# EAGLE board Sen (EAGLE 6.0)
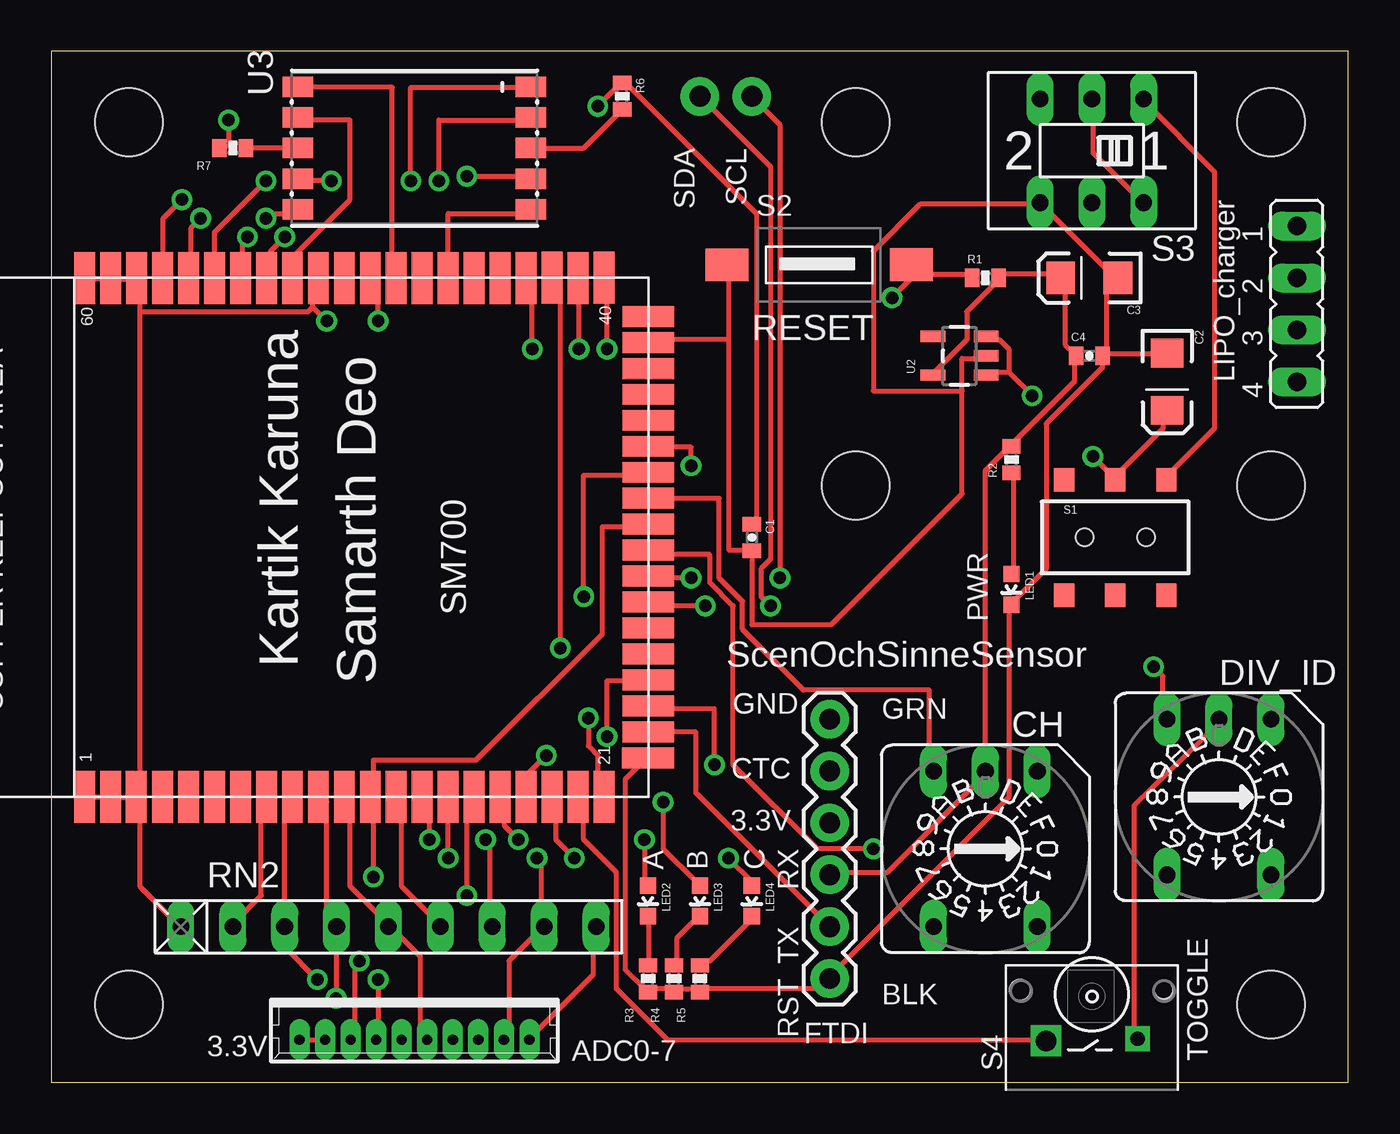
[diagram p0: board, top side]
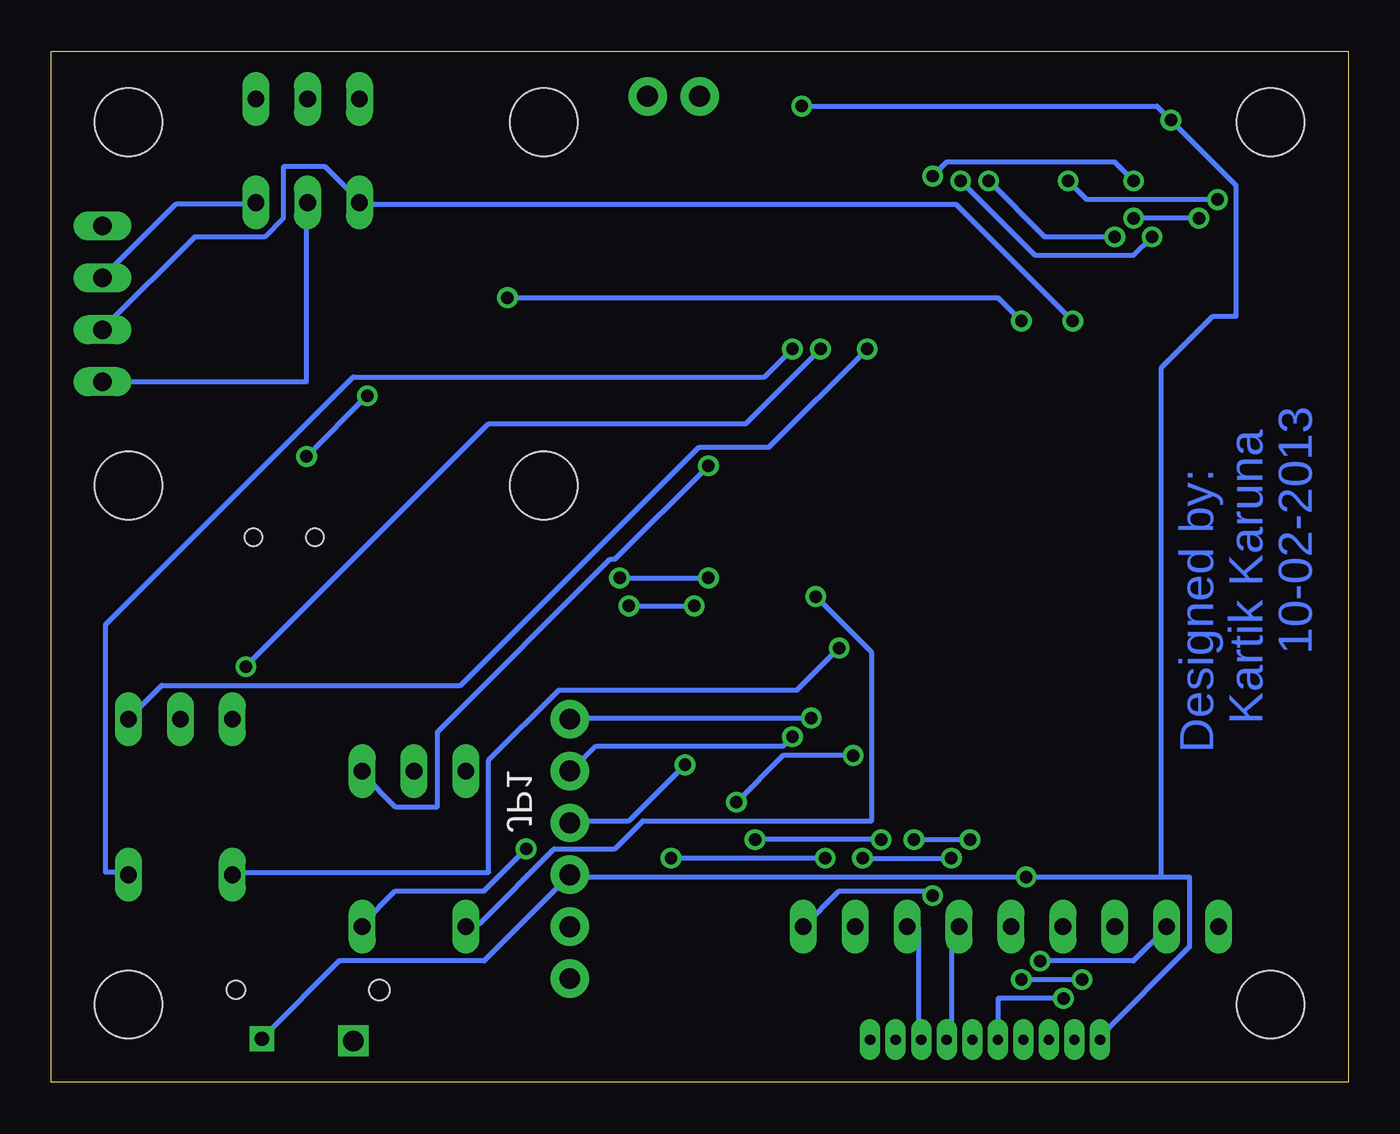
[diagram p1: board, bottom side, seen from below]

Size 63.48 x 50.47 mm. Coordinates in mm from the lower left corner, seen from the top.
Outline: 0,0 63.48,0 63.48,50.47 0,50.47 0,0
Copper layers (1*16): Top 0.035mm / dielectric 1.5mm / Bottom 0.035mm
Design rules: minimum track width 10mil, minimum drill 24mil, track to track 8mil, track to pad 8mil, pad to pad 8mil, via to via 8mil, smd to smd 8mil, copper to edge 40mil, drill to drill 8mil, minimum pad ring 10mil, minimum via ring 8mil, stop-mask expansion 4mil, vias tented up to drill 0mil, thermal gap 10mil
tRestrict: area 49.5,25.4 to 54.6,27.9; area 53.7,3.8 to 55,5.1; area 47,3.8 to 48.3,5.1; area 36.8,26.7 to 41.9,31.8; area 57.1,1.3 to 62.2,6.3; area 57.1,26.7 to 62.2,31.8; area 36.8,44.5 to 41.9,49.5
bRestrict: area 49.5,25.4 to 54.6,27.9; area 47,3.8 to 48.3,5.1; area 53.7,3.8 to 55,5.1; area 36.8,26.7 to 41.9,31.8; area 57.1,1.3 to 62.2,6.3; area 57.1,26.7 to 62.2,31.8; area 36.8,44.5 to 41.9,49.5

## Footprints (pad centres in the part's own frame; a part is rotated, then mirrored left to right if it is on the bottom)
0402-CAP = smd 0.7 x 0.9: 1 -0.65,0; 2 0.65,0
EIA3216 = smd 1.4 x 1.6: A 1.4,0; C -1.4,0
A1353HEX = drill 0.813 long: 1 3.81,-2.54; 2 -3.81,2.54; 4 3.81,2.54; 8 -3.81,-2.54; C 3.81,0
FTDI_BASIC = drill 1.016 pad 1.88: CTS 10.16,0; DTR 0,0; GND 12.7,0; RXI 2.54,0; TXO 5.08,0; VCC 7.62,0
JP4 = drill 0.914 long: 1 -3.81,0; 2 -1.27,0; 3 1.27,0; 4 3.81,0
1X02_NO_SILK = drill 1.016 pad 1.88: 1 0,0; 2 2.54,0
STAND-OFF = hole 3.302: 0,0
LED-0603 = smd 0.8 x 0.8: A 0,-0.75; C 0,0.75
0402-RES = smd 0.7 x 0.9: 1 -0.65,0; 2 0.65,0
RN-9 = drill 0.813 long: 1 -10.16,0; 2 -7.62,0; 3 -5.08,0; 4 -2.54,0; 5 0,0; 6 2.54,0; 7 5.08,0; 8 7.62,0; 9 10.16,0
AYZ0202 = smd 1 x 1.15: 1 -2.5,2.825; 2 0,2.825; 3 2.5,2.825; 4 -2.5,-2.825; 5 0,-2.825; 6 2.5,-2.825 | hole 0.85: 1.5,0; -1.5,0
TYCO_FSM = smd 1.6 x 2.1: 1 0,-4.51; 2 -0.01,4.5
A68-A31 = drill 0.813 long: 1 -2.54,-2.54; 2 0,-2.54; 3 2.54,-2.54; 4 -2.54,2.54; 5 0,2.54; 6 2.54,2.54
TYCO_FSMRACDA = drill 1 square: 1 0,2.24 | drill 0.7 square: 2 0.1,-2.24 | hole 1: 2.5,3.5 | hole 0.9: 2.5,-3.5
SYNAPSE_SN700PC1 = smd 2.54 x 1.02: P$1 0,28.83; P$2 0,27.56; P$3 0,26.32; P$4 0,25.02; P$5 0,23.75; P$6 0,22.48; P$7 0,21.21; P$8 0,19.94; P$9 0,18.67; P$10 0,17.4; P$11 0,16.13; P$12 0,14.86; P$13 0,13.59; P$14 0,12.32; P$15 0,11.05; P$16 0,9.78; P$17 0,8.51; P$18 0,7.24; P$19 0,5.97; P$20 0,4.7; P$21 0,3.43; P$40 25.41,3.43; P$41 25.4,4.7; P$42 25.42,5.97; P$43 25.4,7.24; P$44 25.4,8.51; P$45 25.4,9.78; P$46 25.4,11.05; P$47 25.4,12.32; P$48 25.4,13.59; P$49 25.4,14.86; P$50 25.4,16.13; P$51 25.4,17.4; P$52 25.4,18.67; P$53 25.4,19.94; P$54 25.4,21.21; P$55 25.4,22.48; P$56 25.4,23.75; P$57 25.4,25.02; P$58 25.4,26.29; P$59 25.4,27.56; P$60 25.4,28.83 | smd 1.02 x 2.54: P$22 1.91,1.27; P$23 3.19,1.26; P$24 4.46,1.26; P$25 5.73,1.26; P$26 7,1.26; P$27 8.27,1.26; P$28 9.54,1.26; P$29 10.82,1.26; P$30 12.09,1.26; P$31 13.35,1.26; P$32 14.62,1.26; P$33 15.89,1.26; P$34 17.16,1.26; P$35 18.43,1.26; P$36 19.7,1.26; P$37 20.97,1.26; P$38 22.24,1.26; P$39 23.51,1.26
SOT23-5 = smd 0.55 x 1.2: 1 -0.95,-1.3; 2 0,-1.3; 3 0.95,-1.3; 4 0.95,1.3; 5 -0.95,1.3
SMD-7SEG = smd 1 x 1.5: 1 3,-5.7; 2 1.5,-5.7; 3 0,-5.7; 4 -1.5,-5.7; 5 -3,-5.7; 6 -3,5.7; 7 -1.5,5.7; 8 0,5.7; 9 1.5,5.7; 10 3,5.7
53047-10 = drill 0.5 pad 0.698 long: 1 5.625,0.45; 2 4.375,0.45; 3 3.125,0.45; 4 1.875,0.45; 5 0.625,0.45; 6 -0.625,0.45; 7 -1.875,0.45; 8 -3.125,0.45; 9 -4.375,0.45; 10 -5.625,0.45

## Placement (x,y rotation side)
C1  10uF  [0402-CAP]  34.29,26.67 270 top
C2  10uF  [EIA3216]  54.61,34.29 270 top
C3  10uF  [EIA3216]  50.8,39.37 180 top
C4  1uF  [0402-CAP]  50.8,35.56 0 top
CH  HIX DIP  [A1353HEX]  45.72,11.43 90 top
DIV_ID  HIX DIP  [A1353HEX]  57.15,13.97 90 top
JP1  FTDI  [FTDI_BASIC]  38.1,17.78 270 top
JP2  LIPO_charger  [JP4]  60.96,38.1 270 top
JP3  I2C_BUS  [1X02_NO_SILK]  31.75,48.26 0 top
JP4  STAND-OFF  [STAND-OFF]  59.69,3.81 0 top
JP5  STAND-OFF  [STAND-OFF]  3.81,3.81 0 top
JP6  STAND-OFF  [STAND-OFF]  3.81,46.99 0 top
JP7  STAND-OFF  [STAND-OFF]  59.69,46.99 0 top
JP8  STAND-OFF  [STAND-OFF]  59.69,29.21 0 top
JP9  STAND-OFF  [STAND-OFF]  39.37,46.99 0 top
JP10  STAND-OFF  [STAND-OFF]  39.37,29.21 0 top
LED1  RED  [LED-0603]  46.99,24.13 180 top
LED2  GREEN  [LED-0603]  29.21,8.89 180 top
LED3  YELLOW  [LED-0603]  31.75,8.89 180 top
LED4  BLUE  [LED-0603]  34.29,8.89 180 top
R1  100k  [0402-RES]  45.72,39.37 0 top
R2  1k  [0402-RES]  46.99,30.48 90 top
R3  330  [0402-RES]  29.21,5.08 90 top
R4  330  [0402-RES]  30.48,5.08 90 top
R5  330  [0402-RES]  31.75,5.08 90 top
R6  330  [0402-RES]  27.94,48.26 270 top
R7  330  [0402-RES]  8.89,45.72 0 top
RN2  22K  [RN-9]  16.51,7.62 0 top
S1  Secondary sw  [AYZ0202]  52.07,26.67 0 top
S2  RESET  [TYCO_FSM]  37.59,40.01 270 top
S3  Primary sw  [A68-A31]  50.93,45.59 180 top
S4  TOGGLE  [TYCO_FSMRACDA]  50.93,2.03 90 top
U1  SM700PC1SMD  [SYNAPSE_SN700PC1]  30.48,13.97 90 top
U2  MIC5219  [SOT23-5]  44.45,35.56 90 top
U3  KCSA03-102SMD_7SEG  [SMD-7SEG]  17.78,45.72 90 top
X2  ADC0-7  [53047-10]  17.78,2.54 180 top

## Library data of the parts
C1-C4 R1-R7 = SparkFun-Passives
CH DIV_ID = switch-dil; OC_FARNELL: unknown; OC_NEWARK: unknown
JP1 JP3 = SparkFun-Connectors
JP2 = jumper
JP4-JP10 = SparkFun
LED1-LED4 = SparkFun-LED
RN2 = resistor-net; OC_FARNELL: unknown; OC_NEWARK: unknown
S1 = SparkFun-Electromechanical
S2 S4 = cy_fsmsm
S3 = switch
U1 = Synapse_SM700PC1
U2 = SparkFun-PowerIC
U3 = cy-7-seg
X2 = con-molex; MF: MOLEX; MPN: 53047-1010; OC_FARNELL: 9733086; OC_NEWARK: 57H4711

## Nets
3.3V: C1.1 C3.A C4.1 CH.C DIV_ID.C JP1.VCC R1.2 R2.2 R6.1 R7.1 S4.2 U1.P$12 U1.P$31 U2.5 X2.1 X2.2
7SEG_A: U1.P$57 U3.7
7SEG_B: U1.P$56 U3.6
7SEG_C: U1.P$55 U3.4
7SEG_D: U1.P$54 U3.2
7SEG_DP: U1.P$46 U3.5
7SEG_E: U1.P$53 U3.1
7SEG_F: U1.P$52 U3.9
7SEG_G: U1.P$48 U3.10
ADC0: RN2.2 U1.P$8 X2.3
ADC1: RN2.3 U1.P$9 X2.4
ADC2: RN2.4 U1.P$10 X2.5
ADC3: RN2.5 U1.P$11 X2.6
ADC4: RN2.6 U1.P$13 X2.7
ADC5: RN2.7 U1.P$14 X2.8
ADC6: RN2.8 U1.P$15 X2.9
ADC7: RN2.9 U1.P$16 X2.10
CH_1: CH.1 U1.P$34
CH_2: CH.2 U1.P$33
CH_3: CH.4 U1.P$32
CH_4: CH.8 U1.P$30
CTS2: JP1.CTS U1.P$23
DIV_1: DIV_ID.1 U1.P$43
DIV_2: DIV_ID.2 U1.P$42
DIV_3: DIV_ID.4 U1.P$41
DIV_4: DIV_ID.8 U1.P$40
EN: JP2.4 S3.5
GND: C1.2 C2.C C3.C C4.2 JP1.GND JP2.3 LED1.C R3.1 R4.1 R5.1 RN2.1 S2.1 S3.6 U1.P$1 U1.P$2 U1.P$3 U1.P$22 U1.P$38 U1.P$51 U1.P$58 U1.P$59 U1.P$60 U2.2
LED2: LED2.A U1.P$17
LED3: LED3.A U1.P$18
LED4: LED4.A U1.P$19
N$1: LED3.C R4.2
N$2: LED1.A R2.1
N$3: R6.2 U3.3
N$4: LED2.C R3.2
N$5: R7.2 U3.8
N$6: LED4.C R5.2
PS: JP2.1
RESET: R1.1 S2.2 U1.P$49
RTS2: JP1.DTR U1.P$21
RX2: JP1.TXO U1.P$24
SCL: JP3.2 U1.P$29
SDA: JP3.1 U1.P$28
TOGL: S4.1 U1.P$20
TX2: JP1.RXI U1.P$25
VBATT: JP2.2 S3.2 S3.4
VCC1: S1.3 S3.1
VIN: C2.A S1.2 U2.1 U2.3

## Tracks (layer width: path | path; a pad name or v marks a point on that pad's centre or on a via)
3.3V  (via drill 0.61)
  Top 0.254: C1.1 34.29,27.43 34.52,27.66 34.52,42.52 28.12,48.92 R6.1 27.89,48.92 v26.75,47.78 | v8.69,47.09 8.69,45.95 8.46,45.72 R7.1 | U2.5 43.2,34.75 44.81,36.35 44.81,37.72 46.18,39.09 46.18,39.32 R1.2 46.41,39.55 49.38,39.55 C3.A 49.61,39.32 49.61,36.12 50.06,35.66 C4.1 50.06,35.43 50.06,34.29 47.09,31.32 R2.2 46.86,31.09 45.72,29.95 CH.C 45.72,15.09 40.92,10.29 38.18,10.29 JP1.VCC | X2.1 12.34,2.06 13.26,2.06 X2.2 | v15.77,10.06 15.77,13.95 U1.P$12 15.77,14.17 15.77,15.77 20.8,15.77 26.98,21.95 26.98,27.2 29.03,27.2 U1.P$31 | DIV_ID.C 57.15,17.6 53.01,13.59 53.01,2.29 S4.2
  Bottom 0.254: v26.75,47.78 9.37,47.78 v8.69,47.09 5.49,43.89 5.49,37.49 6.63,37.49 9.14,34.98 9.14,10.06 | S4.2 53.03,2.29 49.38,5.94 42.29,5.94 38.18,10.06 JP1.VCC 37.95,10.06 v15.77,10.06 9.14,10.06 | 9.14,10.06 7.77,10.06 7.77,6.63 12.12,2.29 X2.1
7SEG_A  (via drill 0.61)
  Top 0.254: v13.72,44.12 12.12,44.12 U3.7 | v6.4,43.2 5.49,42.29 5.49,39.55 U1.P$57
  Bottom 0.254: v13.72,44.12 12.8,43.2 v6.4,43.2
7SEG_B  (via drill 0.61)
  Top 0.254: v10.52,42.29 10.52,42.52 11.89,42.52 U3.6 | v7.32,42.29 6.86,41.83 6.86,39.55 U1.P$56
  Bottom 0.254: v7.32,42.29 v10.52,42.29
7SEG_C  (via drill 0.61)
  Top 0.254: v20.34,44.35 23.32,44.35 U3.4 | v10.52,44.12 8,41.6 8,39.55 U1.P$55
  Bottom 0.254: v20.34,44.35 19.66,45.03 11.43,45.03 v10.52,44.12
7SEG_D  (via drill 0.61)
  Top 0.254: v18.97,44.12 18.97,47.09 23.32,47.09 U3.2 | v9.6,41.38 9.37,41.15 9.37,39.55 U1.P$54
  Bottom 0.254: v18.97,44.12 15.32,40.46 10.52,40.46 v9.6,41.38
7SEG_DP
  Top 0.254: U3.5 23.32,42.52 19.43,42.52 19.43,39.55 U1.P$46
7SEG_E  (via drill 0.61)
  Top 0.254: v17.6,44.12 17.6,48.69 23.32,48.69 U3.1 | v11.43,41.38 10.74,40.69 10.74,39.55 U1.P$53
  Bottom 0.254: v17.6,44.12 14.86,41.38 v11.43,41.38
7SEG_F
  Top 0.254: U3.9 12.12,47.09 14.63,47.09 14.63,43.2 11.89,40.46 11.89,39.55 U1.P$52
7SEG_G
  Top 0.254: U3.10 12.12,48.69 16.69,48.69 16.69,39.55 U1.P$48
ADC0  (via drill 0.61)
  Top 0.254: v15.09,5.94 14.86,5.71 14.86,2.29 X2.3 | U1.P$8 10.52,13.95 10.29,13.72 10.29,9.14 8.91,7.77 RN2.2
  Bottom 0.254: v15.09,5.94 10.52,5.94 8.91,7.54 RN2.2
ADC1  (via drill 0.61)
  Top 0.254: v16,5.03 16,2.29 X2.4 | v13.03,5.03 11.43,6.63 RN2.3 11.43,13.72 11.66,13.95 U1.P$9
  Bottom 0.254: v13.03,5.03 v16,5.03
ADC2  (via drill 0.61)
  Top 0.254: v13.95,4.12 13.95,7.54 RN2.4 13.95,7.77 13.49,8.23 13.49,13.72 13.26,13.95 U1.P$10
  Bottom 0.254: v13.95,4.12 17.14,4.12 17.14,2.29 X2.5
ADC3
  Top 0.254: X2.6 18.29,2.29 18.06,2.52 18.06,6.17 16.69,7.54 RN2.5 16.46,7.77 14.63,9.6 14.63,13.72 14.4,13.95 U1.P$11
ADC4
  Top 0.254: U1.P$13 16.92,13.95 17.14,13.72 17.14,9.6 18.97,7.77 RN2.6
  Bottom 0.254: X2.7 19.43,2.29 19.43,7.54 19.2,7.54 RN2.6
ADC5  (via drill 0.61)
  Top 0.254: v18.52,11.89 18.52,13.72 18.29,13.95 U1.P$14 | v21.26,11.89 21.49,11.66 21.49,7.77 RN2.7
  Bottom 0.254: X2.8 21.03,2.29 21.03,7.54 21.49,7.54 RN2.7 | v21.26,11.89 v18.52,11.89
ADC6  (via drill 0.61)
  Top 0.254: X2.9 22.17,2.29 22.4,2.52 22.4,5.94 24,7.54 RN2.8 24,7.77 24,10.74 v23.77,10.97 | v19.43,10.97 19.43,13.95 U1.P$15
  Bottom 0.254: v23.77,10.97 v19.43,10.97
ADC7  (via drill 0.61)
  Top 0.254: X2.10 23.55,2.29 26.52,5.26 26.52,7.54 RN2.9 | v20.34,9.14 20.34,13.72 20.57,13.95 U1.P$16
  Bottom 0.254: v20.34,9.14 20.57,9.37 24.92,9.37 RN2.9
CH_1  (via drill 0.61)
  Top 0.254: v31.32,30.18 31.32,31.09 29.26,31.09 U1.P$34
  Bottom 0.254: v31.32,30.18 35.89,25.6 36.12,25.6 44.58,17.14 44.58,13.49 46.63,13.49 48.23,15.09 CH.1
CH_2  (via drill 0.61)
  Top 0.254: v26.06,23.77 26.06,29.72 29.03,29.72 U1.P$33
  Bottom 0.254: v26.06,23.77 23.32,21.03 23.32,12.8 34.52,12.8 35.89,11.43 38.86,11.43 42.52,7.77 42.98,7.77 CH.2
CH_3
  Top 0.254: U1.P$32 29.26,28.57 32.69,28.57 32.69,24.69 33.83,23.55 33.83,22.17 36.8,19.2 42.98,19.2 42.98,15.32 CH.4
CH_4  (via drill 0.61)
  Top 0.254: v40.23,11.43 37.49,11.43 33.38,15.54 33.38,23.32 32.23,24.46 32.23,25.83 29.26,25.83 U1.P$30
  Bottom 0.254: v40.23,11.43 42.29,9.37 46.63,9.37 48.23,7.77 CH.8
CTS2
  Top 0.254: JP1.CTS 31.55,14.17 31.55,17.14 29.26,17.14 U1.P$23
DIV_1  (via drill 0.61)
  Top 0.254: v23.55,35.89 23.55,39.09 23.32,39.32 U1.P$43
  Bottom 0.254: v23.55,35.89 28.35,31.09 31.77,31.09 43.43,19.43 58.06,19.43 59.66,17.83 DIV_ID.1
DIV_2  (via drill 0.61)
  Top 0.254: v24.92,21.26 24.92,39.09 24.69,39.32 U1.P$42
  Bottom 0.254: v24.92,21.26 26.98,19.2 38.63,19.2 42.06,15.77 42.06,10.29 54.41,10.29 DIV_ID.2
DIV_3  (via drill 0.61)
  Top 0.254: v25.83,35.89 25.83,39.32 U1.P$41 | v53.95,20.34 54.41,19.89 54.41,17.83 DIV_ID.4
  Bottom 0.254: v25.83,35.89 29.49,32.23 42.06,32.23 v53.95,20.34
DIV_4  (via drill 0.61)
  Top 0.254: v27.2,35.89 27.2,39.32 U1.P$40
  Bottom 0.254: v27.2,35.89 28.57,34.52 48.69,34.52 60.81,22.4 60.81,10.29 59.89,10.29 DIV_ID.8
EN
  Bottom 0.254: JP2.4 50.98,34.29 50.98,42.98 S3.5
GND  (via drill 0.61)
  Top 0.254: U1.P$1 1.83,13.95 2.74,13.95 U1.P$2 2.97,13.95 4.12,13.95 U1.P$3 | RN2.1 6.17,7.77 4.34,9.6 4.34,13.95 U1.P$3 | U1.P$60 1.83,39.32 2.74,39.32 U1.P$59 2.97,39.32 4.12,39.32 U1.P$58 4.34,39.32 4.34,37.72 | 12.8,37.95 12.8,39.09 13.03,39.32 U1.P$51 | 12.8,37.95 12.57,37.72 4.34,37.72 | 4.34,37.72 4.34,14.17 U1.P$3 | 33.15,36.35 33.15,40.01 S2.1 | 33.15,36.35 33.15,26.06 34.29,26.06 C1.2 34.29,22.4 38.18,22.4 44.58,28.8 44.58,33.83 | 44.58,33.83 44.58,35.43 45.72,35.43 U2.2 | 33.15,36.35 29.26,36.35 U1.P$38 | U1.P$22 29.03,15.77 28.12,14.86 28.12,5.49 29.03,4.57 R3.1 29.26,4.57 30.4,4.57 R4.1 30.63,4.57 31.55,4.57 R5.1 31.77,4.57 37.95,4.57 37.95,5.03 JP1.GND 38.18,5.26 46.86,13.95 46.86,23.32 LED1.C 47.09,23.55 48.69,25.15 48.69,32.23 51.44,34.98 51.44,35.43 C4.2 51.66,35.66 | 52.12,39.32 51.66,38.86 51.66,35.66 | 51.66,35.66 54.41,35.66 C2.C | 52.12,39.32 S3.6 48.23,42.98 42.52,42.98 40.23,40.69 40.23,33.83 44.58,33.83 | 52.12,39.32 C3.C | v13.49,37.26 12.8,37.95
  Bottom 0.254: JP2.3 60.81,37.03 56.46,41.38 53.03,41.38 52.12,42.29 52.12,44.81 50.06,44.81 48.46,43.2 S3.6 48.23,42.98 19.2,42.98 v13.49,37.26
LED2  (via drill 0.61)
  Top 0.254: v29.03,11.89 29.03,9.83 LED2.A | v22.86,11.89 22.17,12.57 22.17,13.95 U1.P$17
  Bottom 0.254: v22.86,11.89 v29.03,11.89
LED3  (via drill 0.61)
  Top 0.254: v29.95,13.72 29.95,11.43 31.55,9.83 LED3.A | v24.23,16 23.32,15.09 23.32,14.17 U1.P$18
  Bottom 0.254: v29.95,13.72 27.66,16 v24.23,16
LED4  (via drill 0.61)
  Top 0.254: v33.15,10.97 34.29,9.83 LED4.A | v25.6,10.97 24.69,11.89 24.69,13.95 U1.P$19
  Bottom 0.254: v25.6,10.97 v33.15,10.97
N$1
  Top 0.254: LED3.C 31.55,8 30.63,7.09 30.63,5.94 R4.2
N$2
  Top 0.254: LED1.A 47.09,24.92 47.09,29.72 R2.1
N$3
  Top 0.254: U3.3 26.06,45.72 27.89,47.55 R6.2
N$4
  Top 0.254: LED2.C 29.26,8 29.26,5.94 R3.2
N$5
  Top 0.254: U3.8 R7.2
N$6
  Top 0.254: LED4.C 34.29,8 32.23,5.94 31.77,5.94 R5.2
RESET  (via drill 0.61)
  Top 0.254: 42.29,39.55 45.03,39.55 R1.1 | 42.29,39.55 42.29,40.01 S2.2 42.29,39.55 | v16,37.26 16,39.09 15.77,39.32 U1.P$49 | 42.29,39.55 v41.15,38.41
  Bottom 0.254: v16,37.26 17.14,38.41 v41.15,38.41
RTS2  (via drill 0.61)
  Top 0.254: v26.29,17.83 26.29,16.46 26.75,16 26.75,14.4 26.98,14.17 U1.P$21
  Bottom 0.254: v26.29,17.83 37.95,17.83 JP1.DTR
RX2  (via drill 0.61)
  Top 0.254: v32.46,15.54 32.46,18.29 29.26,18.29 U1.P$24
  Bottom 0.254: v32.46,15.54 35.2,12.8 37.95,12.8 JP1.TXO
SCL  (via drill 0.61)
  Top 0.254: v31.32,24.69 29.26,24.69 U1.P$29 | v35.66,24.69 35.66,46.86 34.29,48.23 JP3.2
  Bottom 0.254: v35.66,24.69 v31.32,24.69
SDA  (via drill 0.61)
  Top 0.254: v32,23.32 29.26,23.32 U1.P$28 | v35.2,23.32 34.75,23.77 34.75,25.15 35.2,25.6 35.2,44.81 JP3.1
  Bottom 0.254: v35.2,23.32 v32,23.32
TOGL
  Top 0.254: U1.P$20 25.83,13.95 26.06,13.72 26.06,11.89 27.66,10.29 27.66,4.57 30.18,2.06 48.46,2.06 S4.1
TX2  (via drill 0.61)
  Top 0.254: v27.2,16.92 27.2,19.66 29.03,19.66 U1.P$25
  Bottom 0.254: v27.2,16.92 27.66,16.46 36.8,16.46 37.95,15.32 JP1.RXI
VBATT
  Top 0.254: S3.4 53.26,43.2 50.98,45.49 50.98,48.01 S3.2
  Bottom 0.254: JP2.2 60.81,39.55 57.38,42.98 53.49,42.98 S3.4
VCC1
  Top 0.254: S1.3 54.63,29.72 56.92,32 56.92,44.58 53.49,48.01 S3.1
VIN  (via drill 0.61)
  Top 0.254: 46.86,34.75 45.95,34.75 U2.1 | 46.86,34.75 46.86,35.89 46.41,36.35 45.95,36.35 U2.3 | C2.A 54.41,32.69 54.41,32 52.12,29.72 S1.2 51.89,29.72 v50.98,30.63 | v48.01,33.6 46.86,34.75
  Bottom 0.254: v50.98,30.63 v48.01,33.6

## Text on the board
Bottom: 10-02-2013 | Kartik Karuna | Designed by:
tPlace: SDA | SCL | Kartik Karuna | Samarth Deo | PWR | SM700 | ScenOchSinneSensor | GND | GRN | CTC | 3.3V | RX | A | B | C | TX | RST | BLK | 3.3V